# Altium PCB PCB1.PcbDoc
Units mil, origin at the board's own origin, x right, y up, seen from the top; angles counter-clockwise.
Board outline 1181.1 x 688.98 mil, 2 copper layers (Top Layer, Bottom Layer); 16 components, 19 nets, 56 pads, 0 vias.
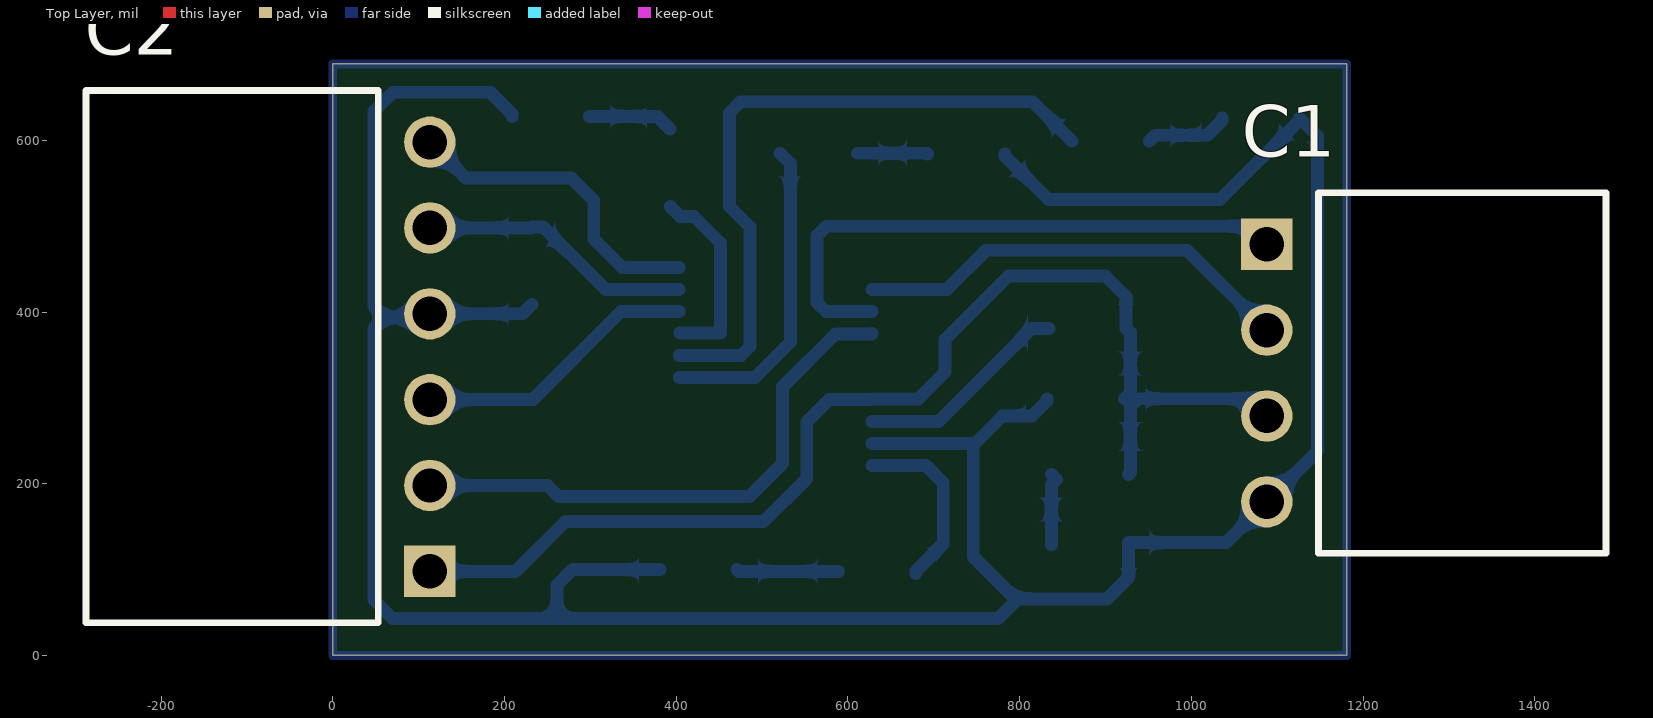
[diagram p0: Top Layer view]
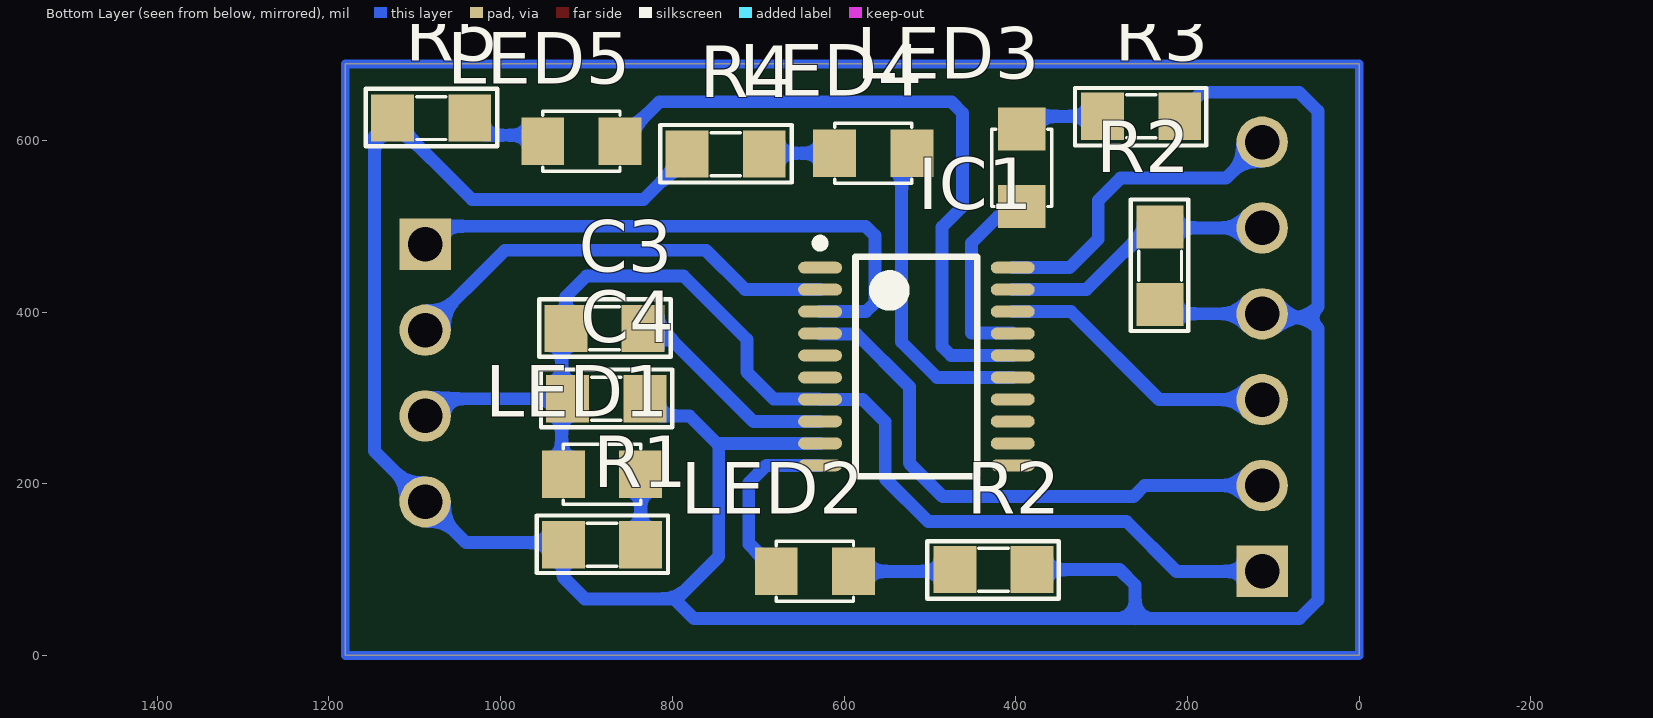
[diagram p1: Bottom Layer view, seen from below]
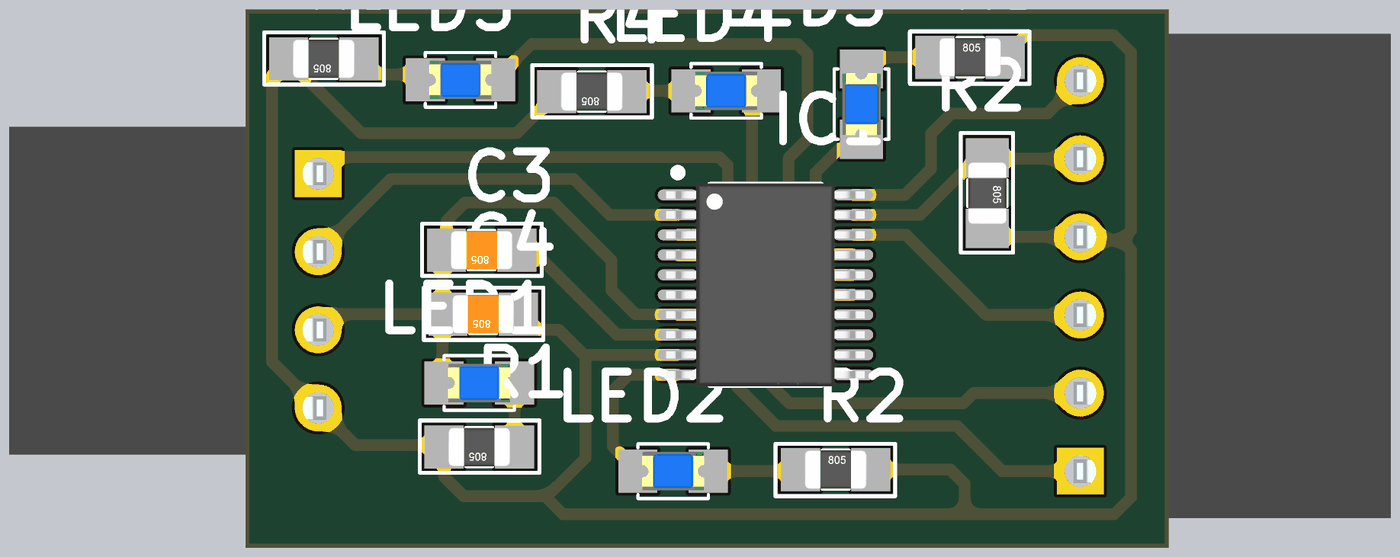
[diagram p2: 3D render of the assembled board from below, using the file's embedded part models]

## Layer stack, top to bottom
Top Solder: solder mask 0.4, Solder Resist, Dk 3.5
Top Layer: signal copper 1.4
Dielectric 1: dielectric 12.6, FR-4, Dk 4.8
Bottom Layer: signal copper 1.4
Bottom Solder: solder mask 0.4, Solder Resist, Dk 3.5

## Board outline
0,0 0,688.98 1181.1,688.98 1181.1,0

## Design rules (kind name [scope] priority, off if disabled: settings)
Clearance [All] p1: gap=10 ignorepadtopadclearanceinfootprint=FALSE
PolygonConnect [All] p1: connectstyle=Relief reliefconductorwidth=10 reliefentries=4 polygonreliefangle="90 Angle" airgapwidth=10
RoomDefinition Sheet1 [InComponentClass('Sheet1')] p1: confinementstyle=ConfineIn formatcopy=TRUE lockcomponents=FALSE outline 1615.08,-141.3 4220.08,-141.3 4220.08,618.7 1615.08,618.7
RoutingVias [All] p1: holewidth=28 width=50 viastyle="Through Hole" minholewidth=28 minwidth=50 maxholewidth=28 maxwidth=50
SolderMaskExpansion [All] p1: expansion=4
Width [All] p1: maxlimit=10 minlimit=10 preferedwidth=10
30 further rules are at their usual default settings.

## Classes and differential pairs
component class Sheet1: C1 C2 C3 C4 IC1 LED1 LED2 LED3 LED4 LED5 R1 R2 R3 R4 R5

## Components (designator, comment, footprint, x,y, rotation, side; value= is the part's Value field where it differs from the comment)
C1 "JP4" JP4-C1C 1088,329 r270 top
C2 "JP6" JP6-C1C 113,348 r90 top
C3 "104" SM-CAP-0805 834,381 r0 bottom value=0,1uF/300V
C4 "104" SM-CAP-0805 832,299 r0 bottom value=0,1uF/300V
IC1 "STM8S003F3P6" TSSOP20 515.75,336.61 r180 bottom value=24Cxx
LED1 "LED SMD" SM-LED-0805-Blue 837,211 r0 bottom
LED2 "LED SMD" SM-LED-0805-Blue 589,98 r0 bottom
LED3 "LED SMD" SM-LED-0805-Blue 393,613 r270 bottom
LED4 "LED SMD" SM-LED-0805-Blue 611,585 r180 bottom
LED5 "LED SMD" SM-LED-0805-Blue 951,599 r180 bottom
R1 "1k" SM-RES-0805 837,129 r0 bottom value="R1/4W - 1K"
R2 "1k" SM-RES-0805 471,100 r180 bottom value="R1/4W - 1K"
R2 "1k" SM-RES-0805 232,499 r270 bottom value="R1/4W - 1K"
R3 "1k" SM-RES-0805 299,628 r180 bottom value="R1/4W - 1K"
R4 "1k" SM-RES-0805 693,584 r0 bottom value="R1/4W - 1K"
R5 "1k" SM-RES-0805 1036,626 r0 bottom value="R1/4W - 1K"

## Footprints (in the part's own frame and the unit in brackets; to place one, negate y for a bottom-side part, rotate by r counter-clockwise, add the part's x,y. Pads: shape width x height; smd on the part's side, far side on the other; paste and mask are expansions set on the pad)
JP4-C1C [mm] "04p 1 row Right angle"
  rect 1.52x1.52 hole 1.02: 1(-3.81,0)
  round 1.52 hole 1.02: 2(-1.27,0) 3(1.27,0) 4(3.81,0)
  silkscreen extent -5.33,1.52 5.33,10.03, body extent -5.33,-0.25 5.33,10.05, height 2.51
JP6-C1C [mm] "06p 1 row Right angle"
  rect 1.52x1.52 hole 1.02: 1(-6.35,0)
  round 1.52 hole 1.02: 2(-3.81,0) 3(-1.27,0) 4(1.27,0) 5(3.81,0) 6(6.35,0)
  silkscreen extent -7.87,1.52 7.87,10.17, body extent -7.87,-0.21 7.87,10.09, height 2.51
SM-CAP-0805 [mil]
  rect 50x55 smd: 1(0,0) 2(90,0)
  silkscreen extent -32,-34 121,33, body extent 6,-25 84,25, height 31
SM-LED-0805-Blue [mil]
  rect 50x55 smd: 1(0,0) 2(90,0)
  silkscreen extent 0,-35 90,35, body extent 5,-25 85,25, height 43
SM-RES-0805 [mil]
  rect 50x55 smd: 1(0,0) 2(90,0)
  silkscreen extent -32,-34 121,33, body extent 6,-25 84,25, height 31
TSSOP20 [mm] "TSSOP, 20-Leads, Body 6.50x4.40mm, Pitch 0.65mm, IPC High Density"
  oval 1.3x0.35 smd: 1(-2.85,2.925) 2(-2.85,2.275) 3(-2.85,1.625) 4(-2.85,0.975) 5(-2.85,0.325) 6(-2.85,-0.325) 7(-2.85,-0.975) 8(-2.85,-1.625) 9(-2.85,-2.275) 10(-2.85,-2.925) 11(2.85,-2.925) 12(2.85,-2.275) 13(2.85,-1.625) 14(2.85,-0.975) 15(2.85,-0.325) 16(2.85,0.325) 17(2.85,0.975) 18(2.85,1.625) 19(2.85,2.275) 20(2.85,2.925)
  silkscreen extent -2.98,-3.25 1.8,3.77, body extent -3.23,-3.3 3.23,3.3, height 1.25

## Part data
C1: "WR-PHD 2.54 mm Angled Socket Header", Manufacturer="Würth Elektronik eiSos GmbH", partNo=613004143121, ComponentLink1 Description=Manufacturer, ComponentLink1URL=http://www.we-online.com, ComponentLink2 Description=Datasheet, ComponentLink2URL=http://katalog.we-online.de/em/datasheet/6130xx143121.pdf, Created by="Karrer Zheng", Created Date="29 March 2013", NoPins=04
C2: "WR-PHD 2.54 mm Angled Socket Header", Manufacturer="Würth Elektronik eiSos GmbH", partNo=613006143121, ComponentLink1 Description=Manufacturer, ComponentLink1URL=http://www.we-online.com, ComponentLink2 Description=Datasheet, ComponentLink2URL=http://katalog.we-online.de/em/datasheet/6130xx143121.pdf, Created by="Karrer Zheng", Created Date="29 March 2013", NoPins=06
C3 C4: library part CN, Designed by=VanDungEvn
IC1: "MCU 8BIT  8KB FLASH TSSOP-20", Copyright by=VanDungEvn
LED1 LED2 LED3 LED4 LED5: library part LED-SMD-0805
R1 R2 R2 R3 R4 R5: library part R1/4W, "Resistor 1/4W"

## Nets (pads, with @x,y where several pads share a name; then routed paths per layer and width w, separated by ;. In a path a pad name is that pad's centre, name@x,y a point inside that pad or via, vN(x,y) a via of type N, cw(c..) or ccw(c..) an arc to the next point about the centre after c; other vN are vias at no path point)
5V: C1.4 C2.4 C4.1 IC1.9 R1.2 R2.2 R3.2 R4.2 R5.2 | length 3549
  Bottom Layer w15: R3.2 209,630.5 183.5,656 70,656 48,634 48,406.16 60.58,393.58 ; R2.2@232,409 221,398 C2.4 108.58,393.58 60.58,393.58 ; R2.2@381,100 279,100 261,82 261,43 ; IC1.9 747.95,247.05 779.91,279 814.5,279 832,296.5 C4.1 ; 746,241 746,115 795,66 ; R4.2 783,581.5 833.5,531 1033.5,531 1126,623.5 R5.2 1147,605 1147,238 C1.4 1040.5,131.5 927,131.5 R1.2 927,91 902,66 795,66 ; 60.58,393.58 48,381 48,64.58 69.58,43 261,43 ; 261,43 775,43 796.5,64.5 795,66
GND: C1.3 C2.1 C3.2 C4.2 IC1.7 LED1.2 | length 1407.6
  Bottom Layer w15: C2.1 213,98 271,156 502,156 552,206 552,272 578.23,298.23 IC1.7 628.56,298.84 681.84,298.84 713,330 713,368 787,442 900,442 924,418 C3.2 929,376 929,306 C4.2 ; LED1.2 929,213 C4.2@929,289.5 ; C4.2@929,298.23 C4.2@929,289.5 ; C1.3 1068,299 938.5,299 C4.2@929,289.5
NetC3_1: C3.1 IC1.8 | length 250.9
  Bottom Layer w15: IC1.8 705.64,272.64 814,381 C3.1
NetLED1_1: LED1.1 R1.1 | length 87
  Bottom Layer w15: R1.1 837,199 843,205 LED1.1
NetLED2_1: LED2.1 R2.1@471,100 | length 118.8
  Bottom Layer w15: R2.1@471,100 473,98 LED2.1
NetLED3_1: LED3.1 R3.1 | length 100.2
  Bottom Layer w15: R3.1 378,628 LED3.1
NetLED4_1: LED4.1 R4.1 | length 82.4
  Bottom Layer w15: LED4.1 692,585 R4.1
NetLED5_1: LED5.1 R5.1 | length 97.6
  Bottom Layer w15: LED5.1 958,606 1018.5,606 1036,623.5 R5.1
NRST: C2.2 IC1.4 | length 651.2
  Bottom Layer w15: C2.2 250,198 263,185 485,185 524,224 524,313 585.39,374.39 627.34,374.39 IC1.4
PD2: C2.5 IC1.19 R2.1@232,499 | length 321.1
  Bottom Layer w15: C2.5 231,498 232,499 245,499 317.82,426.18 IC1.19
PD3: C2.6 IC1.20 | length 377.5
  Bottom Layer w15: C2.6 155,556 278,556 304,530 304,485 337.23,451.77 IC1.20
PD10: IC1.10 LED2.2 | length 210.3
  Bottom Layer w15: IC1.10 690.54,221.46 711,201 711,130 LED2.2 LED2.2@679,95.5
PD11: IC1.11
PD15: IC1.15 LED4.2 | length 371.5
  Bottom Layer w15: IC1.15 491.82,323.82 533,365 533,573 LED4.2
PD16: IC1.16 LED5.2 | length 792.2
  Bottom Layer w15: IC1.16 475.41,349.41 486,360 486,499 462,523 462,632 475,645 815,645 LED5.2
PD17: IC1.17 LED3.2 | length 229.4
  Bottom Layer w10: IC1.17 IC1.17@404.15,375.61
  Bottom Layer w15: LED3.2 404.61,511.39 420.61,511.39 451.61,480.39 451.61,375.61 IC1.17@404.15,375.61
RX: C1.1 IC1.3 | length 683.5
  Bottom Layer w15: IC1.3 574.41,400.59 564,411 564,489 575,500 1067,500 C1.1
SWIM: C2.3 IC1.18 | length 333
  Bottom Layer w15: C2.3 233,298 335.59,400.59 IC1.18
TX: C1.2 IC1.2 | length 517.5
  Bottom Layer w15: IC1.2 715.18,426.18 761,472 995,472 C1.2
pads on no net: IC1.1 IC1.5 IC1.6 IC1.12 IC1.13 IC1.14
copper on no net: | length 3740.2
  Bottom Layer w10: 0,0 0,688.98 1181.1,688.98 1181.1,0 0,0

## Silkscreen, mask and mechanical layers (free items; w line width, h text height)
Drill Drawing:
  the board outline again, w10